# Altium PCB ECG_BLE.PcbDoc (part 2 of 3)
Units mm, origin at the board's own origin, x right, y up, seen from the top; angles counter-clockwise.
Board outline 50.01 x 55.29 mm, 4 copper layers (Top Layer, Internal Plane-GND, Internal Plane-PWR, Bottom Layer), stack 0.99 mm thick; 109 components, 65 nets, 326 pads, 171 vias.
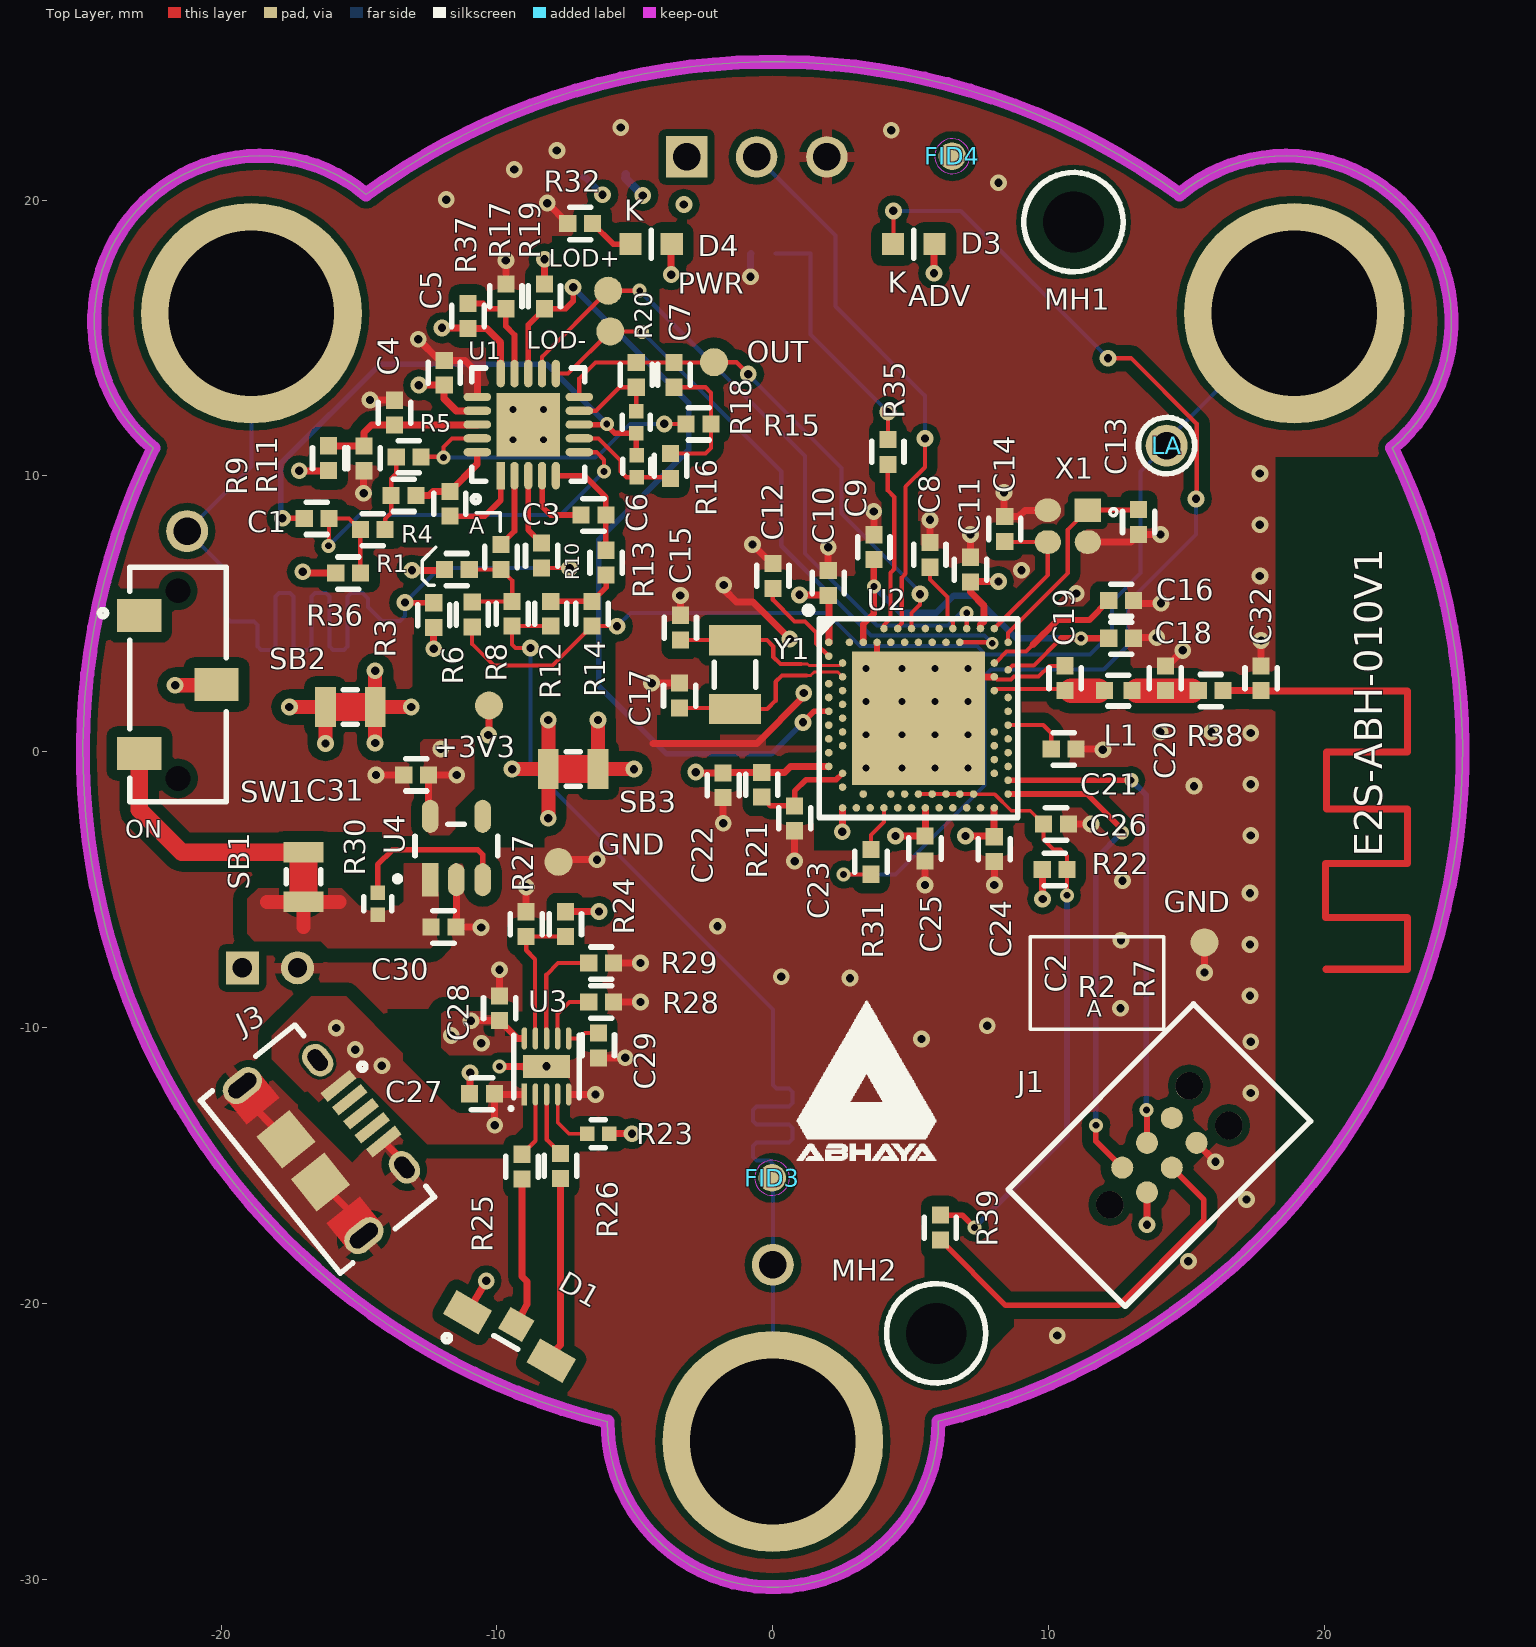
[diagram p0: Top Layer view]

## Via types
v1: diameter 0.61, hole 0.3, Top Layer to Bottom Layer, tented both sides, 132 vias
v2: diameter 0.5, hole 0.25, Top Layer to Bottom Layer, tented both sides, 20 vias
v3: diameter 0.508, hole 0.25, Top Layer to Bottom Layer, tented both sides, 17 vias
v4: diameter 0.457, hole 0.25, Top Layer to Bottom Layer, tented both sides, 1 vias
v5: diameter 0.61, hole 0.305, Top Layer to Bottom Layer, tented both sides, 1 vias

## Nets (pads, with @x,y where several pads share a name; then routed paths per layer and width w, separated by ;. In a path a pad name is that pad's centre, name@x,y a point inside that pad or via, vN(x,y) a via of type N, cw(c..) or ccw(c..) an arc to the next point about the centre after c; other vN are vias at no path point) (continued)
LOD-: (continued)
  Top Layer w0.152: U1.11@-7.865,13.712 -7.421,13.712 LOD-.1@-5.893,15.24 -4.775,15.24 v3(-4.75,15.215) ; U2.B19@6.777,3.969 7.921,3.969 v4(7.953,3.937)
  Bottom Layer w0.152: v3(-4.75,15.215) 0.305,10.16 0.305,7.468 3.556,4.216 7.674,4.216 v4(7.953,3.937)
n_SDN: R19.2 U1.13 U2.L1 | length 31.8
  Top Layer w0.203: U1.13@-8.865,13.712 -8.865,15.476 R19.2@-8.28,16.06 -7.511,16.06 -7.239,16.332 v1(-7.239,16.84) ; v1(1.092,1.067) 1.494,1.469 U2.L1@2.027,1.469
  Bottom Layer w0.203: v1(-7.239,16.84) -3.048,12.649 -3.048,10.947 -6.306,7.689 -6.306,2.378 -3.852,-0.076 -0.051,-0.076 v1(1.092,1.067)
NetC1_1: C1.1 R1.2 R36.1 U1.6 | length 16.4
  Top Layer w0.152: v3(-16.104,7.468) -16.085,7.486 C1.1@-16.085,8.462 -15.364,8.462 R1.2@-14.953,8.052 -14.953,6.488 R36.1@-14.942,6.477 ; U1.6@-7.015,10.862 -6.395,10.862 -6.121,10.588 v3(-6.121,10.16)
  Bottom Layer w0.152: v3(-16.104,7.468) -14.986,8.585 -7.696,8.585 v3(-6.121,10.16)
NetC2_1: C2.1 U1.1 | length 3
  Top Layer w0.203: C2.1@-11.786,8.542 C2.1@-11.709,8.542 -10.442,8.542 -9.865,9.119 U1.1@-9.865,9.912
NetC2_2: C2.2 R4.2 U1.20 | length 3.1
  Top Layer w0.25: R4.2@-12.936,9.296 -12.464,9.296 -12.319,9.442 C2.2@-11.709,9.442 -10.715,10.436 U1.20@-10.715,10.862
NetC3_1: C3.1 R13.2 U1.5 | length 4.1
  Top Layer w0.203: U1.5@-7.865,10.012 -6.837,10.012 -6.052,9.227 C3.1@-6.052,8.585 -6.052,7.315 R13.2@-6.045,7.308
NetC3_2: C3.2 U1.4 | length 2.6
  Top Layer w0.203: U1.4@-8.365,9.987 -8.365,8.898 -8.052,8.585 C3.2@-6.952,8.585
NetC6_2: C6.2 R16.1 U1.7 | length 4.3
  Top Layer w0.152: U1.7@-7.015,11.362 -6.321,11.362 -5.518,10.559 -5.518,10.166 -5.302,9.951 C6.2@-4.928,9.951 -3.593,9.951 R16.1@-3.556,9.913
NetC7_2: C7.2 R15.1 R16.2 | length 5
  Top Layer w0.152: R16.2@-3.708,10.813 -2.446,10.813 -2.242,11.016 R15.1@-2.242,11.887 -2.242,13.012 -2.446,13.215 C7.2@-3.581,13.215
NetC8_1: C8.1 U2.A18 | length 2.6
  Top Layer w0.145: C8.1@5.694,6.689 5.694,6.248 6.328,5.614 6.328,4.99
  Top Layer w0.152: 6.328,4.99 6.328,4.902 6.531,4.699 6.531,4.473 U2.A18@6.527,4.469
NetC13_2: C13.2 U2.B24 X1.1 | length 9.7
  Top Layer w0.152: U2.B24@8.527,3.969 8.527,4.311 10.693,6.477 10.693,8.052 X1.1@11.395,8.754 ; X1.1@11.395,8.754 11.423,8.781 C13.2@13.259,8.781 13.231,8.754 X1.1@11.418,8.754 X1.1@11.395,8.754
NetC14_2: C14.2 U2.A23 X1.3 | length 5.5
  Top Layer w0.152: U2.A23@8.027,4.469 9.968,6.41 X1.3@9.968,7.604 8.431,7.604 C14.2@8.407,7.627
NetC19_2: C19.2 L1.1 U2.H23 | length 3.6
  Top Layer w0.145: U2.H23@8.028,2.218 U2.H23@8.027,2.219 8.027,2.281 10.533,2.281 C19.2@10.596,2.218
  Top Layer w0.889: C19.2@10.823,2.218 L1.1@11.789,2.218
NetC21_2: C21.2 U2.N24 | length 2.8
  Top Layer w0.152: 9.025,0.969 8.527,0.969 9.801,0.969 10.091,0.679 C21.2@10.091,0.102
NetC23_2: C23.2 R21.2 U2.Y2 | length 3.9
  Top Layer w0.203: R21.2@-0.403,-1.644 -0.085,-1.962 C23.2@0.791,-1.962 0.791,-1.421 1.201,-1.011 2.296,-1.011 U2.Y2@2.527,-0.781
NetC29_2: C29.2 U3.6 | length 1.2
  Top Layer w0.152: U3.6@-7.398,-10.39 -7.011,-10.39 -6.814,-10.193 C29.2@-6.325,-10.193